# EAGLE board Ir_Remocon_ver2.1_2bord (EAGLE 9.0.0)
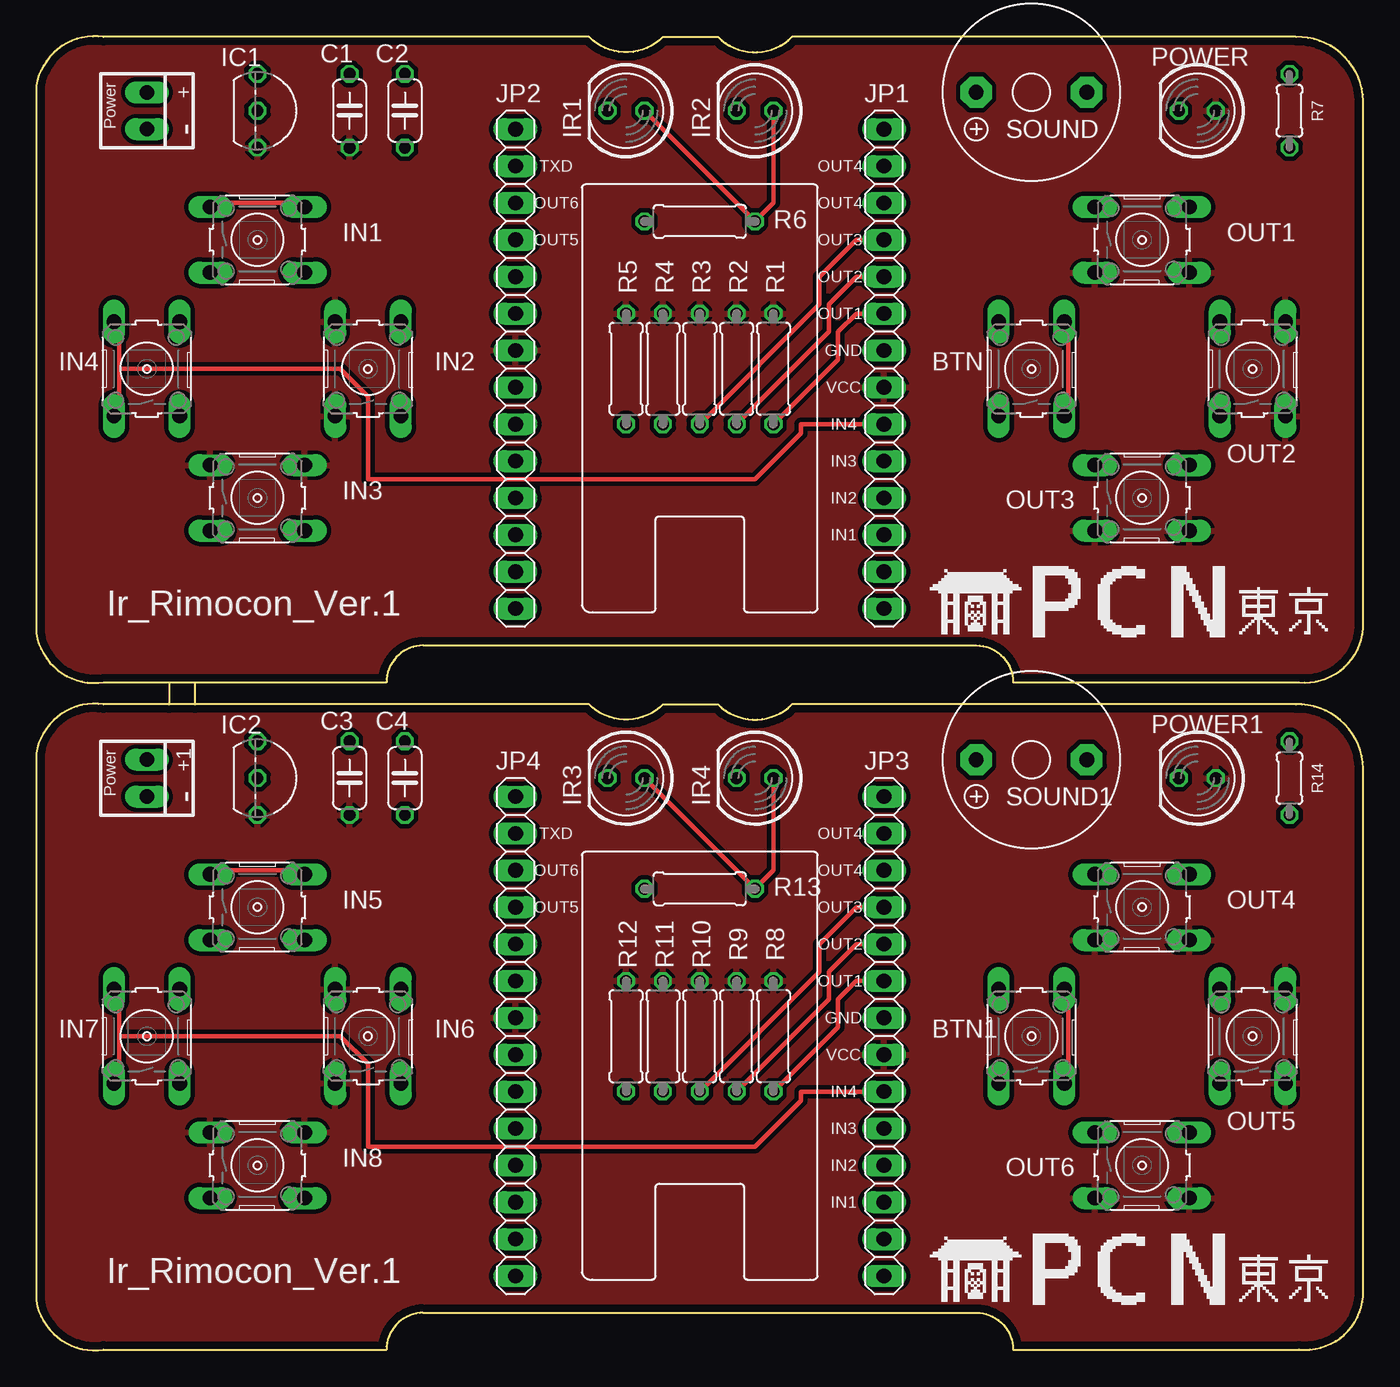
[diagram p0: board, top side]
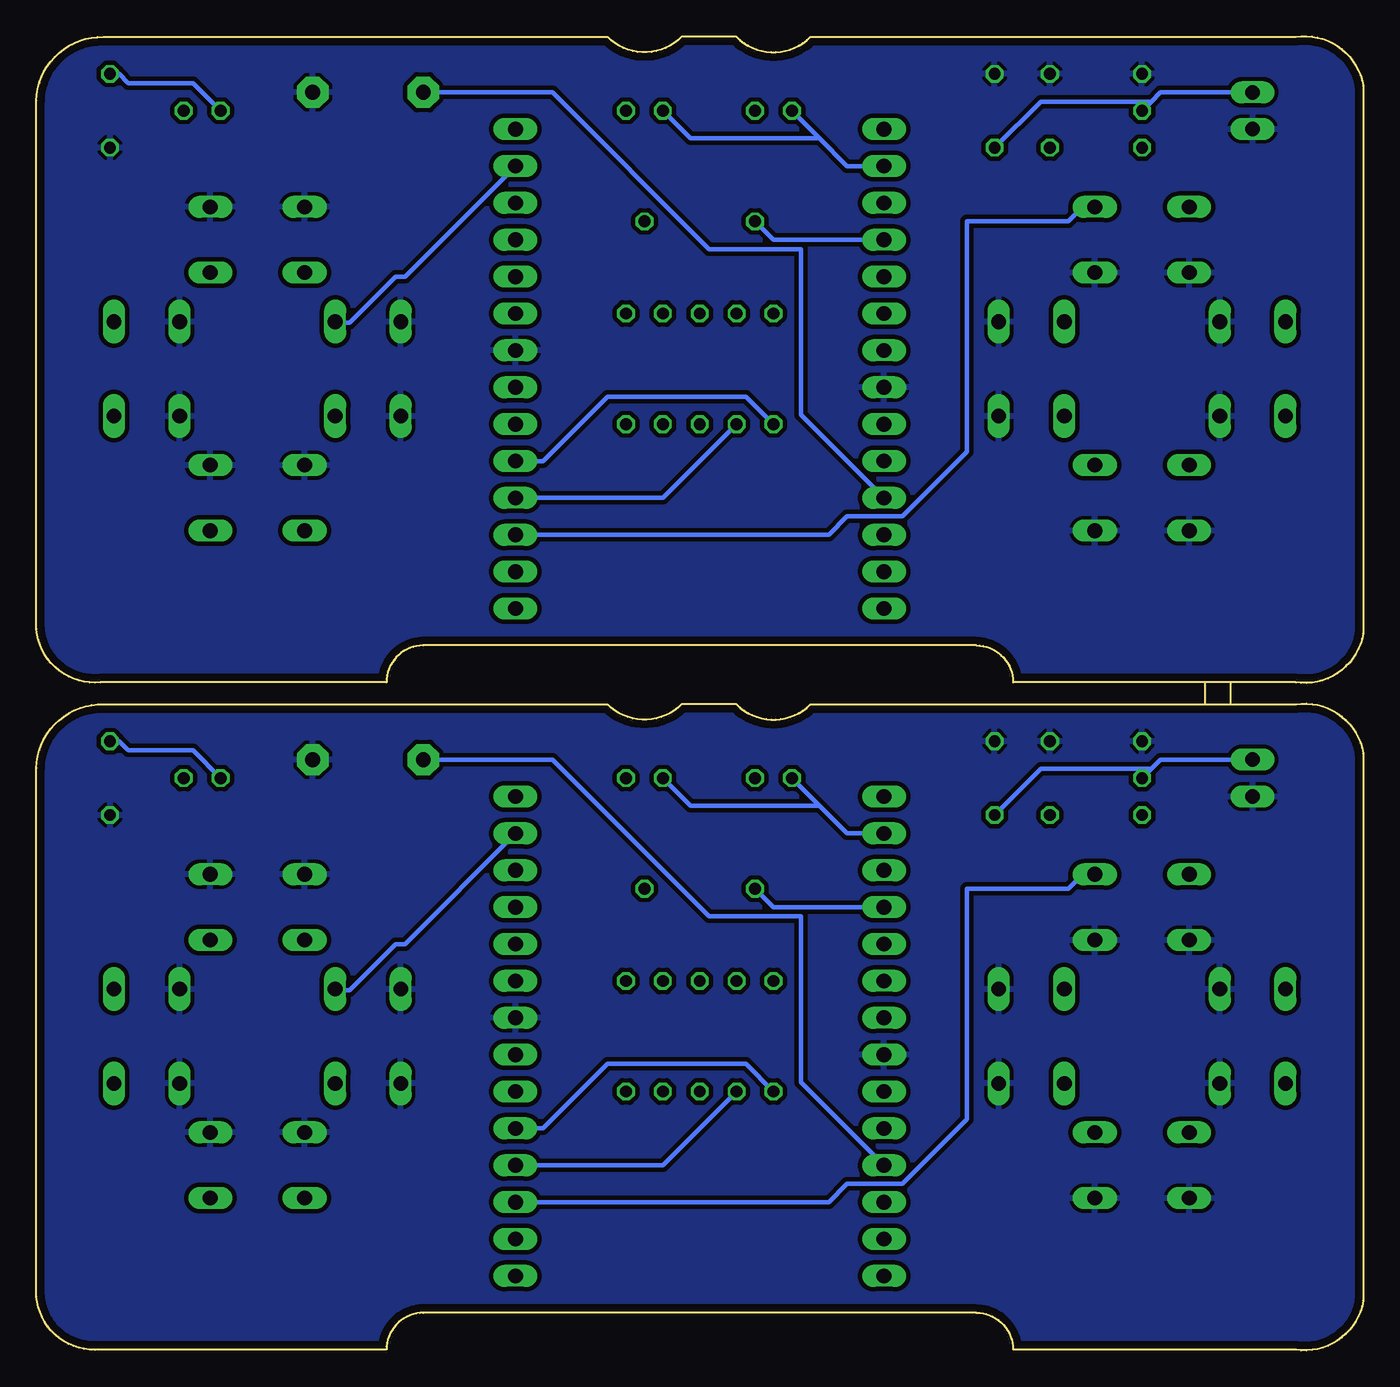
[diagram p1: board, bottom side, seen from below]

Size 91.44 x 90.52 mm. Coordinates in mm from the lower left corner, seen from the top.
Outline: 9.14,46.02 4.64,46.02 arc-90 0,49.4 0,87.1 arc-90 4.64,90.47 38.1,90.47 arc90 43.18,90.47 46.99,90.47 arc90 52.07,90.47 86.8,90.47 arc-90 91.44,86.08 91.44,49.68 arc-90 87.02,46.02 67.31,46.02 arc90 64.77,48.56 26.67,48.56 arc90 24.13,46.02 10.92,46.02
Outline: 9.14,46.02 10.92,46.02
Outline: 10.92,44.5 38.1,44.5 arc90 43.18,44.5 46.99,44.5 arc90 52.07,44.5 86.8,44.5 arc-90 91.44,40.11 91.44,3.7 arc-90 87.02,0.05 67.31,0.05 arc90 64.77,2.59 26.67,2.59 arc90 24.13,0.05 4.64,0.05 arc-90 0,3.42 0,41.12 arc-90 4.64,44.5 9.14,44.5
Outline: 10.92,44.5 9.14,44.5
Outline: 9.14,46.02 9.14,44.5
Outline: 10.92,46.02 10.92,44.5
Copper layers (1*16): Top 0.035mm / dielectric 1.6mm / Bottom 0.035mm
Design rules "Elecrow_2-layer_PCB_eagle_rule": minimum track width 6mil, minimum drill 12mil, track to track 6mil, track to pad 6mil, pad to pad 6mil, via to via 8mil, smd to smd 0mil, copper to edge 20mil, drill to drill 10mil, minimum pad ring 6mil, minimum via ring 6mil, stop-mask expansion 0mil, vias tented up to drill 100mil, thermal gap 10mil
Net classes: 0 default: width 0.303 mm, clearance 0.305 mm; 1 5V: width 0.2 mm, drill 0.2 mm, clearance 0.2 mm

## Footprints (pad centres in the part's own frame; a part is rotated, then mirrored left to right if it is on the bottom)
22-23-2021 = drill 1 long: 1 -1.27,0; 2 1.27,0
B3F-10XX = drill 1.016 long: 1 -3.251,2.261; 2 3.251,2.261; 3 -3.251,-2.261; 4 3.251,-2.261
C050-024X044 = drill 0.813 octagon: 1 -2.54,0; 2 2.54,0
TO92- = drill 0.813 octagon: GND -2.54,0; VIN 0,0; VOUT 2.54,0
LED5MM = drill 0.813 octagon: A -1.27,0; K 1.27,0
1X14 = drill 1.016 long: 1 -16.51,0; 2 -13.97,0; 3 -11.43,0; 4 -8.89,0; 5 -6.35,0; 6 -3.81,0; 7 -1.27,0; 8 1.27,0; 9 3.81,0; 10 6.35,0; 11 8.89,0; 12 11.43,0; 13 13.97,0; 14 16.51,0
0207/7 = drill 0.813 octagon: 1 -3.81,0; 2 3.81,0
0204/5 = drill 0.813 octagon: 1 -2.54,0; 2 2.54,0
F/TMB = drill 1.016 pad 2.159 octagon: + 3.81,0; - -3.81,0

## Placement (x,y rotation side)
+  22-23-2021  [22-23-2021]  7.62,85.39 270 top
+1  22-23-2021  [22-23-2021]  7.62,39.42 270 top
BTN  [B3F-10XX]  68.58,67.61 90 top
BTN1  [B3F-10XX]  68.58,21.64 90 top
C1  [C050-024X044]  21.59,85.39 90 top
C2  [C050-024X044]  25.4,85.39 90 top
C3  [C050-024X044]  21.59,39.42 90 top
C4  [C050-024X044]  25.4,39.42 90 top
IC1  [TO92-]  15.24,85.39 270 top
IC2  [TO92-]  15.24,39.42 270 top
IN1  [B3F-10XX]  15.24,76.5 0 top
IN2  [B3F-10XX]  22.86,67.61 90 top
IN3  [B3F-10XX]  15.24,58.72 0 top
IN4  [B3F-10XX]  7.62,67.61 90 top
IN5  [B3F-10XX]  15.24,30.53 0 top
IN6  [B3F-10XX]  22.86,21.64 90 top
IN7  [B3F-10XX]  7.62,21.64 90 top
IN8  [B3F-10XX]  15.24,12.75 0 top
IR1  [LED5MM]  40.64,85.39 180 top
IR2  [LED5MM]  49.53,85.39 180 top
IR3  [LED5MM]  40.64,39.42 180 top
IR4  [LED5MM]  49.53,39.42 180 top
JP1  [1X14]  58.42,67.61 270 top
JP2  [1X14]  33.02,67.61 270 top
JP3  [1X14]  58.42,21.64 270 top
JP4  [1X14]  33.02,21.64 270 top
OUT1  [B3F-10XX]  76.2,76.5 0 top
OUT2  [B3F-10XX]  83.82,67.61 90 top
OUT3  [B3F-10XX]  76.2,58.72 0 top
OUT4  [B3F-10XX]  76.2,30.53 0 top
OUT5  [B3F-10XX]  83.82,21.64 90 top
OUT6  [B3F-10XX]  76.2,12.75 0 top
POWER  [LED5MM]  80.01,85.39 180 top
POWER1  [LED5MM]  80.01,39.42 180 top
R1  1KΩ  [0207/7]  50.8,67.61 90 top
R2  1KΩ  [0207/7]  48.26,67.61 90 top
R3  1KΩ  [0207/7]  45.72,67.61 90 top
R4  1KΩ  [0207/7]  43.18,67.61 270 top
R5  1KΩ  [0207/7]  40.64,67.61 270 top
R6  100Ω  [0207/7]  45.72,77.77 0 top
R7  330Ω  [0204/5]  86.36,85.39 90 top
R8  1KΩ  [0207/7]  50.8,21.64 90 top
R9  1KΩ  [0207/7]  48.26,21.64 90 top
R10  1KΩ  [0207/7]  45.72,21.64 90 top
R11  1KΩ  [0207/7]  43.18,21.64 270 top
R12  1KΩ  [0207/7]  40.64,21.64 270 top
R13  100Ω  [0207/7]  45.72,31.8 0 top
R14  330Ω  [0204/5]  86.36,39.42 90 top
SOUND  [F/TMB]  68.58,86.66 180 top
SOUND1  [F/TMB]  68.58,40.69 180 top

## Library data of the parts
+ +1 = con-molex; MF: MOLEX; MPN: 22-23-2021; OC_FARNELL: 1462926; OC_NEWARK: 25C3832
BTN BTN1 IN1-IN8 OUT1-OUT6 = switch-omron; MPN: B3F-1000; OC_FARNELL: 176432; OC_NEWARK: 36M3542
C1-C4 = resistor
IC1 IC2 = HT7333_SOT89
IR1-IR4 POWER POWER1 = led
JP1-JP4 = pinhead
R1-R14 = rcl; SPICEPREFIX: R
SOUND SOUND1 = buzzer; OC_FARNELL: unknown; OC_NEWARK: unknown

## Nets
3.3V: C1.1 IC1.VOUT IN2.1 IN2.2 IN3.1 IN3.2 JP1.8 JP2.7 OUT1.3 OUT1.4 OUT2.3 OUT2.4 OUT3.3 OUT3.4 POWER.A R1.2 R2.2 R3.2 R4.1 R5.1
3.3V1: C3.1 IC2.VOUT IN6.1 IN6.2 IN8.1 IN8.2 JP3.8 JP4.7 OUT4.3 OUT4.4 OUT5.3 OUT5.4 OUT6.3 OUT6.4 POWER1.A R8.2 R9.2 R10.2 R11.1 R12.1
5V: +.1 C2.1 IC1.VIN
5V1: +1.1 C4.1 IC2.VIN
BTN: BTN.3 BTN.4 JP1.2
BTN1: BTN1.3 BTN1.4 JP3.2
GND: +.2 BTN.1 BTN.2 C1.2 C2.2 IC1.GND IN1.3 IN1.4 IN2.3 IN2.4 IN3.3 IN3.4 IN4.3 IN4.4 JP1.7 JP2.8 OUT1.1 OUT1.2 OUT2.1 OUT2.2 OUT3.1 OUT3.2 R7.1 SOUND.-
GND1: +1.2 BTN1.1 BTN1.2 C3.2 C4.2 IC2.GND IN5.3 IN5.4 IN6.3 IN6.4 IN7.3 IN7.4 IN8.3 IN8.4 JP3.7 JP4.8 OUT4.1 OUT4.2 OUT5.1 OUT5.2 OUT6.1 OUT6.2 R14.1 SOUND1.-
IN1: IN1.1 IN1.2 JP1.12
IN2: JP1.11 R4.2
IN3: JP1.10 R5.2
IN4: IN4.1 IN4.2 JP1.9
IN5: IN7.1 IN7.2 JP3.9
IN6: JP3.10 R12.2
IN7: JP3.11 R11.2
IN8: IN5.1 IN5.2 JP3.12
ISP: JP2.10
ISP1: JP4.10
LED: JP1.1
LED1: JP3.1
N$1: IR1.A IR2.A R6.2
N$2: POWER.K R7.2
N$3: IR3.A IR4.A R13.2
N$4: POWER1.K R14.2
OUT1: JP1.6 R1.1
OUT2: JP1.5 R2.1
OUT3: JP1.4 R3.1
OUT4: JP1.3
OUT5: JP2.4 R6.1
OUT6: JP4.4 R13.1
OUT7: JP3.3
OUT8: JP3.4 R10.1
OUT9: JP3.5 R9.1
OUT10: JP3.6 R8.1
SOUND: JP2.11 SOUND.+
SOUND1: JP4.11 SOUND1.+
TXD: IR1.K IR2.K JP2.2
TXD1: IR3.K IR4.K JP4.2
VIDEO1: JP1.14
VIDEO2: JP1.13
VIDEO3: JP3.13
VIDEO4: JP3.14

## Tracks (layer width: path | path; a pad name or v marks a point on that pad's centre or on a via)
3.3V
  pour Top: 0,90.47 91.44,90.47 91.44,46.02 0,46.02
3.3V1
  pour Top: 0,44.5 91.44,44.5 91.44,0.05 0,0.05
5V
  Bottom 0.303: 14.6,86.03 13.97,86.66 +.1 | 14.6,86.03 IC1.VIN | C2.1 22.23,86.03 14.6,86.03
5V1
  Bottom 0.303: 14.6,40.05 13.97,40.69 +1.1 | 14.6,40.05 IC2.VIN | C4.1 22.23,40.05 14.6,40.05
BTN
  Top 0.303: BTN.3 71.12,64.44 71.12,70.79 BTN.4
  Bottom 0.303: JP1.2 66.04,73.96 66.68,73.96 69.85,70.79 70.49,70.79 BTN.4
BTN1
  Top 0.303: BTN1.3 71.12,18.46 71.12,24.81 BTN1.4
  Bottom 0.303: JP3.2 66.04,27.99 66.68,27.99 69.85,24.81 70.49,24.81 BTN1.4
GND
  pour Bottom: 0,90.47 91.44,90.47 91.44,46.02 0,46.02
GND1
  pour Bottom: 0,44.5 91.44,44.5 91.44,0.05 0,0.05
IN1
  Top 0.303: IN1.1 12.06,79.04 18.41,79.04 IN1.2
  Bottom 0.303: JP1.12 36.83,56.18 35.56,57.45 31.75,57.45 27.3,61.9 27.3,77.77 20.32,77.77 19.69,78.41 19.05,78.41 IN1.2
IN2
  Bottom 0.303: R4.2 48.26,58.72 JP1.11
IN3
  Bottom 0.303: R5.2 42.55,65.71 52.07,65.71 56.51,61.26 JP1.10
IN4
  Top 0.303: 5.71,67.61 5.71,70.79 IN4.2 | 5.71,67.61 5.71,64.44 IN4.1 | JP1.9 52.71,63.8 52.71,63.17 49.53,59.99 22.86,59.99 22.86,65.71 20.95,67.61 5.71,67.61
IN5
  Top 0.303: 5.71,21.64 5.71,24.81 IN7.2 | 5.71,21.64 5.71,18.46 IN7.1 | JP3.9 52.71,17.83 52.71,17.19 49.53,14.02 22.86,14.02 22.86,19.73 20.95,21.64 5.71,21.64
IN6
  Bottom 0.303: R12.2 42.55,19.73 52.07,19.73 56.51,15.29 JP3.10
IN7
  Bottom 0.303: R11.2 48.26,12.75 JP3.11
IN8
  Top 0.303: IN5.1 12.06,33.07 18.41,33.07 IN5.2
  Bottom 0.303: JP3.12 36.83,10.21 35.56,11.48 31.75,11.48 27.3,15.92 27.3,31.8 20.32,31.8 19.69,32.43 19.05,32.43 IN5.2
N$1
  Top 0.303: IR2.A 50.8,79.04 R6.2 IR1.A
N$2
  Bottom 0.303: POWER.K 80.65,87.3 85.09,87.3 85.72,87.93 R7.2
N$3
  Top 0.303: IR4.A 50.8,33.07 R13.2 IR3.A
N$4
  Bottom 0.303: POWER1.K 80.65,41.32 85.09,41.32 85.72,41.96 R14.2
OUT1
  Top 0.303: R1.1 55.24,68.25 55.24,70.15 56.51,71.42 JP1.6
OUT2
  Top 0.303: R2.1 54.61,70.15 54.61,72.06 56.51,73.96 JP1.5
OUT3
  Top 0.303: R3.1 53.98,72.06 53.98,73.96 56.51,76.5 JP1.4
OUT5
  Bottom 0.303: R6.1 40.64,76.5 JP2.4
OUT6
  Bottom 0.303: R13.1 40.64,30.53 JP4.4
OUT8
  Top 0.303: R10.1 53.98,26.08 53.98,27.99 56.51,30.53 JP3.4
OUT9
  Top 0.303: R9.1 54.61,24.18 54.61,26.08 56.51,27.99 JP3.5
OUT10
  Top 0.303: R8.1 55.24,22.27 55.24,24.18 56.51,25.45 JP3.6
SOUND
  Bottom 0.303: JP2.11 38.73,64.44 38.73,75.87 45.09,75.87 55.88,86.66 SOUND.+
SOUND1
  Bottom 0.303: JP4.11 38.73,18.46 38.73,29.89 45.09,29.89 55.88,40.69 SOUND1.+
TXD
  Bottom 0.303: 37.46,83.49 35.56,81.58 JP2.2 | 37.46,83.49 IR1.K | IR2.K 46.35,83.49 37.46,83.49
TXD1
  Bottom 0.303: 37.46,37.51 35.56,35.61 JP4.2 | 37.46,37.51 IR3.K | IR4.K 46.35,37.51 37.46,37.51

## Text on the board
tPlace: Power | - | TXD | OUT4 | OUT6 | OUT4 | OUT5 | OUT3 | OUT2 | OUT1 | GND | VCC | IN4 | IN3 | IN2 | IN1 | Ir_Rimocon_Ver.1 | Power | - | TXD | OUT4 | OUT6 | OUT4 | OUT5 | OUT3 | OUT2 | OUT1 | GND | VCC | IN4 | IN3 | IN2 | IN1 | Ir_Rimocon_Ver.1